# Altium PCB OPTO_PRESSURE.PcbDoc
Units mm, origin at the board's own origin, x right, y up, seen from the top; angles counter-clockwise.
Board outline 234 x 50 mm, 4 copper layers (Top Layer, Ground Plane, Power Plane, Bottom Layer), stack 0.844 mm thick; 43 components, 41 nets, 153 pads, 63 vias.
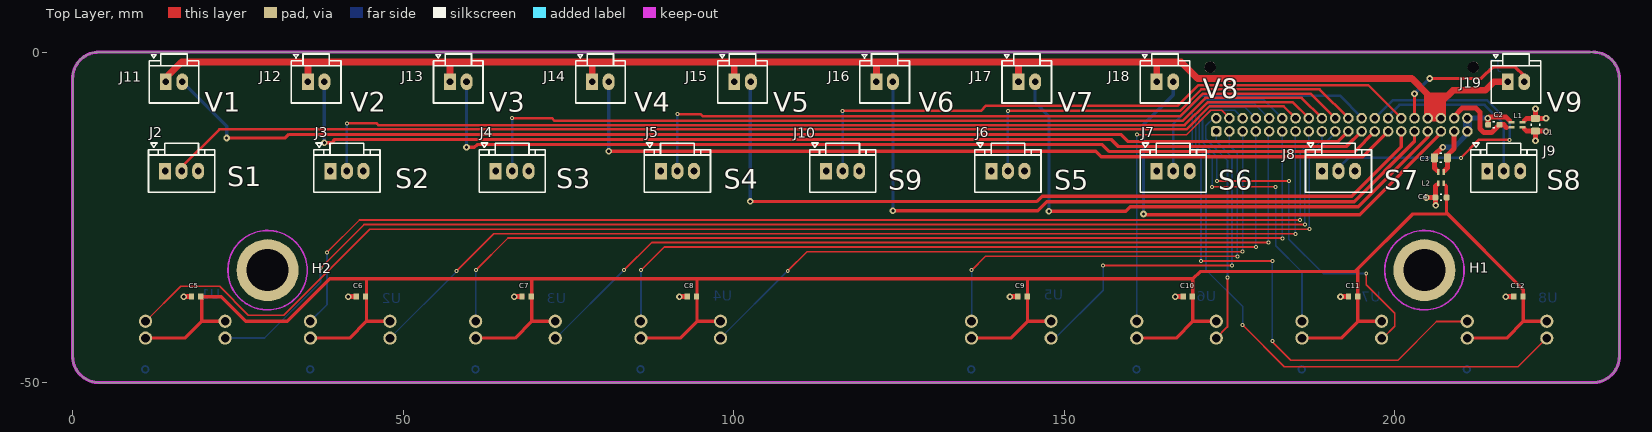
[diagram p0: Top Layer view]
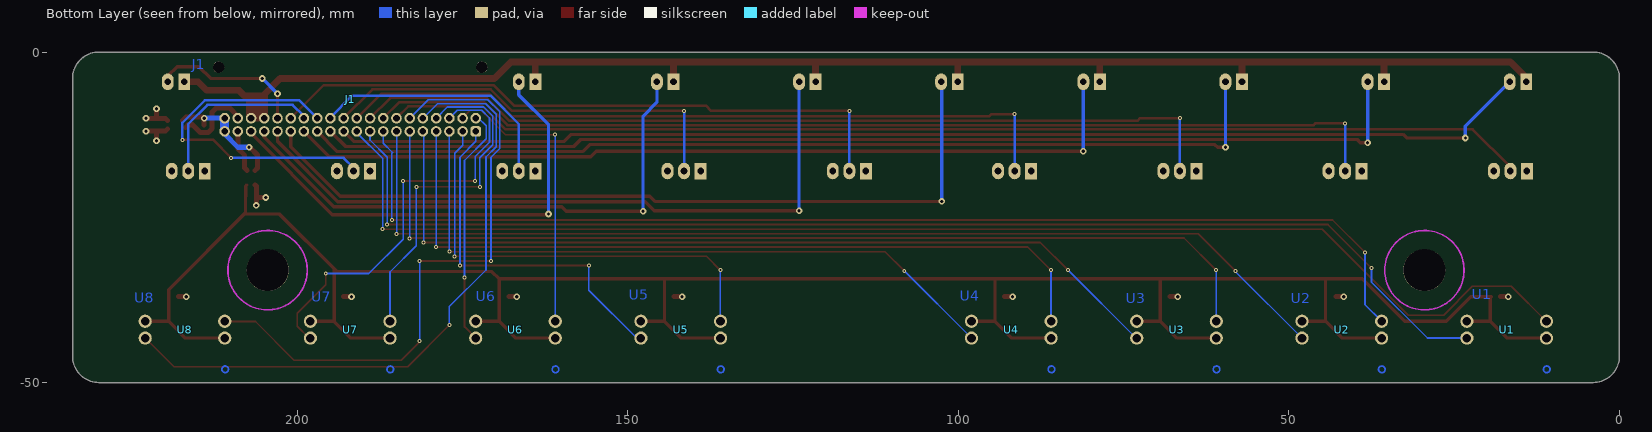
[diagram p1: Bottom Layer view, seen from below]
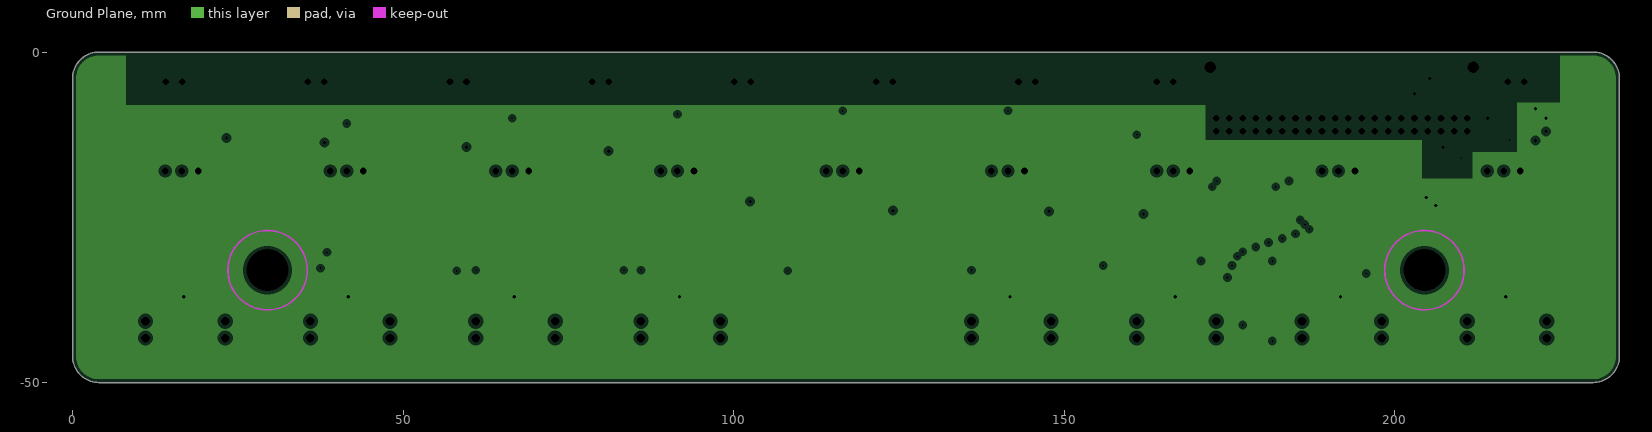
[diagram p2: Ground Plane, clearances drawn from the general rule]
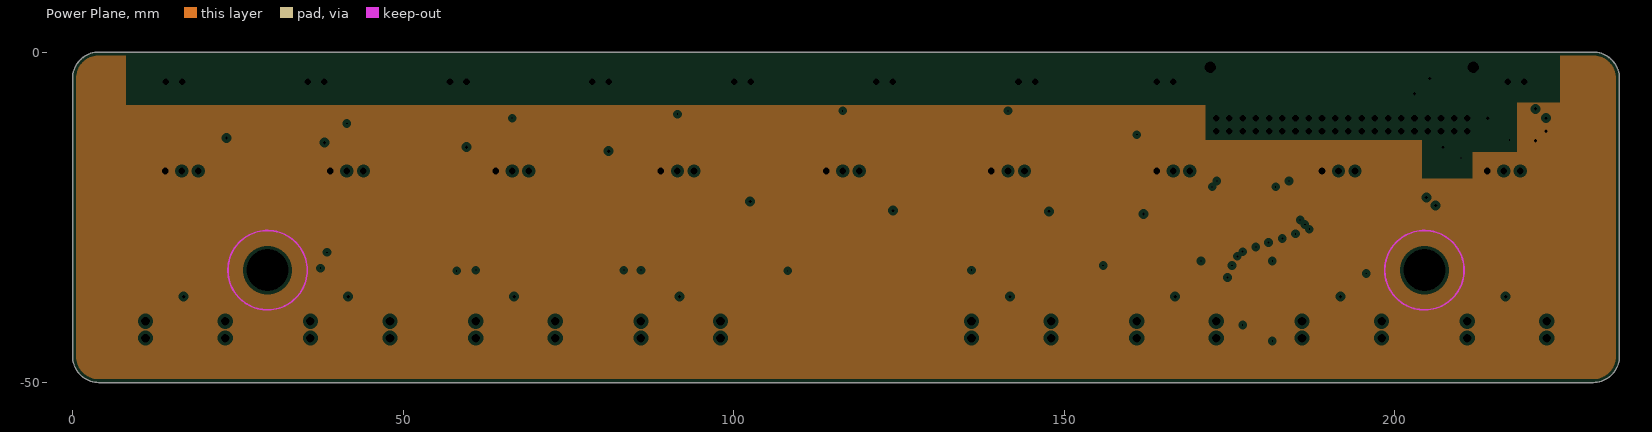
[diagram p3: Power Plane, clearances drawn from the general rule]
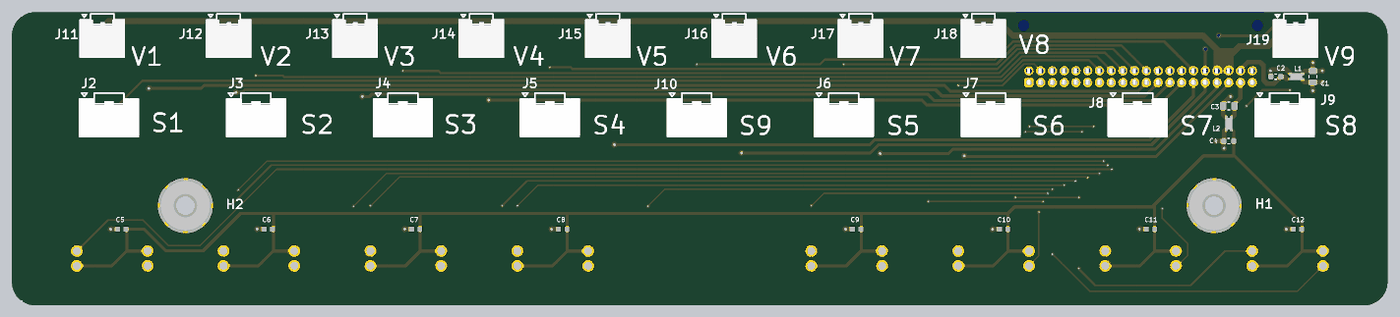
[diagram p4: 3D render of the assembled board from above, using the file's embedded part models]
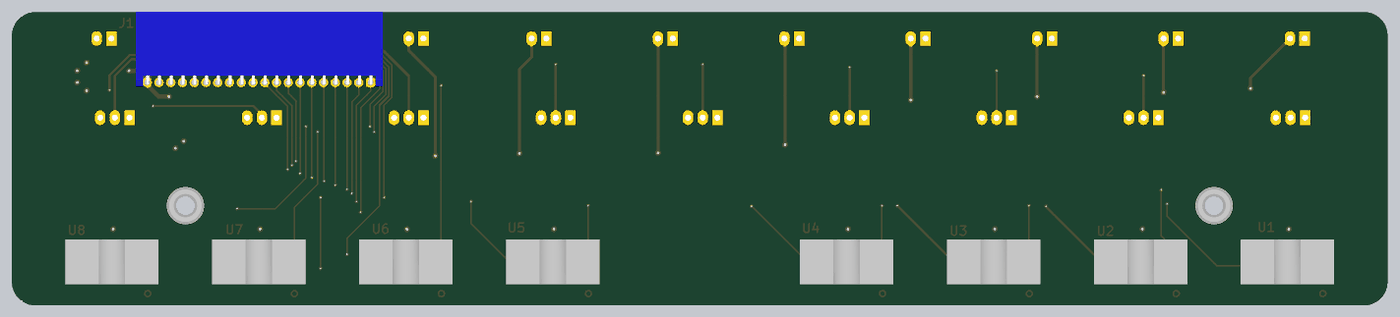
[diagram p5: 3D render of the assembled board from below, using the file's embedded part models]

## Layer stack, top to bottom
Top Solder: solder mask 0.0102, Solder Resist, Dk 3.5
Top Layer: signal copper 0.0356
Dielectric 1: core 0.32, FR-4, Dk 4.8
Ground Plane: plane copper 0.036, net AN_GND
Dielectric 3: prepreg 0.127, Dk 4.2
Power Plane: plane copper 0.036, net 5V_fil
Dielectric 4: core 0.254, Dk 4.2
Bottom Layer: signal copper 0.0356
Bottom Solder: solder mask 0.0102, Solder Resist, Dk 3.5

## Board outline
0.001,-46 0.001,-4 cw(c4.001,-4) 4.001,0 230.001,0 cw(c230.001,-4) 234.001,-4 234.001,-46 cw(c230.001,-46) 230.001,-50 4.001,-50 cw(c4.001,-46)

## Design rules (kind name [scope] priority, off if disabled: settings)
Clearance [All] p1: gap=0.254 ignorepadtopadclearanceinfootprint=TRUE
HoleSize [All] p1: absolutevalues=TRUE maxlimit=25.4 minlimit=0.025 maxpercent=80.000 minpercent=20.000
MinimumSolderMaskSliver [All] p1: minsoldermaskwidth=0.178
PlaneClearance [All] p1: clearance=0.508
PlaneConnect [All] p1: planeconnectstyle=Direct reliefexpansion=0.508 reliefentries=4 reliefconductorwidth=0.508 reliefairgap=0.254
PolygonConnect [All] p1: connectstyle=Relief reliefconductorwidth=0.508 reliefentries=4 polygonreliefangle="90 Angle" airgapwidth=0.254
RoutingVias [All] p1: holewidth=0.711 width=1.27 viastyle="Through Hole" minholewidth=0.254 minwidth=0.508 maxholewidth=0.508 maxwidth=1.27
SilkToSilkClearance [All] p1: silktosilkclearance=0
SilkToSolderMaskClearance [IsPad] p1: minsilkscreentomaskgap=0.178 clearancetoexposedcopper=TRUE
SolderMaskExpansion [All] p1: expansion=0.102 istentingtop=FALSE
Width [All] p1: maxlimit=1.016 minlimit=0.203 preferedwidth=0.203 minimp=50.000000 maximp=50.000000 favimp=50.000000
24 further rules are at their usual default settings.

## Components (designator, comment, footprint, x,y, rotation, side; value= is the part's Value field where it differs from the comment)
C1 "47u/10V" CAPC2012X13N(0805) 221.3,-11 r270 top locked
C2 "1uf" CAPC1608X09N(0603) 215,-11 r0 top locked
C3 "47u/10V" CAPC2012X13N(0805) 207,-16 r0 top locked
C4 "1u" CAPC1608X09N(0603) 207,-22 r0 top locked
C5 "Cap Semi" 1608[0603] 18.7,-37 r180 top locked value=0.1uF
C6 "Cap Semi" 1608[0603] 43.6,-37 r180 top locked value=0.1uF
C7 "Cap Semi" 1608[0603] 68.7,-37 r180 top locked value=0.1uF
C8 "Cap Semi" 1608[0603] 93.7,-37 r180 top locked value=0.1uF
C9 "Cap Semi" 1608[0603] 143.7,-37 r180 top locked value=0.1uF
C10 "Cap Semi" 1608[0603] 168.7,-37 r180 top locked value=0.1uF
C11 "Cap Semi" 1608[0603] 193.7,-37 r180 top locked value=0.1uF
C12 "Cap Semi" 1608[0603] 218.7,-37 r180 top locked value=0.1uF
H1 "SMTSO_M4_4" SMTSO_M4_4 204.5,-33 r180 top locked
H2 "SMTSO_M4_4" SMTSO_M4_4 29.5,-33 r180 top locked
J1 "S40-PUDSS-1" S40B-PUDSS-1 173,-12 r180 bottom locked
J2 "CON3" XA3 14,-18 r180 top locked
J3 "CON3" XA3 39,-18 r180 top locked
J4 "CON3" XA3 64,-18 r180 top locked
J5 "CON3" XA3 89,-18 r180 top locked
J6 "CON3" XA3 139,-18 r180 top locked
J7 "CON3" XA3 164,-18 r180 top locked
J8 "CON3" XA3 189,-18 r180 top locked
J9 "CON3" XA3 214,-18 r180 top locked
J10 "CON3" XA3 114,-18 r180 top locked
J11 "VALVE" XA2 14.1,-4.5 r180 top locked
J12 "VALVE" XA2 35.6,-4.5 r180 top locked
J13 "VALVE" XA2 57.1,-4.5 r180 top locked
J14 "VALVE" XA2 78.6,-4.5 r180 top locked
J15 "VALVE" XA2 100.1,-4.5 r180 top locked
J16 "VALVE" XA2 121.6,-4.5 r180 top locked
J17 "VALVE" XA2 143.1,-4.5 r180 top locked
J18 "VALVE" XA2 164,-4.5 r180 top
J19 "VALVE" XA2 217.1,-4.5 r180 top locked
L1 "744231091" WE-CNSW-0805 218.5,-11 r180 top locked
L2 "744231091" WE-CNSW-0805 207,-19 r270 top locked
U1 "OPB350L250" OPB350L250 17.055,-42 r0 bottom locked
U2 "OPB350L250" OPB350L250 42,-42 r0 bottom locked
U3 "OPB350L250" OPB350L250 67,-42 r0 bottom locked
U4 "OPB350L250" OPB350L250 92,-42 r0 bottom locked
U5 "OPB350L250" OPB350L250 142,-42 r0 bottom locked
U6 "OPB350L250" OPB350L250 167,-42 r0 bottom locked
U7 "OPB350L250" OPB350L250 192,-42 r0 bottom locked
U8 "OPB350L250" OPB350L250 217,-42 r0 bottom locked

## Footprints (in the part's own frame and the unit in brackets; to place one, negate y for a bottom-side part, rotate by r counter-clockwise, add the part's x,y. Pads: shape width x height; smd on the part's side, far side on the other; paste and mask are expansions set on the pad)
1608[0603] [mm] "Chip Capacitor, Body 1.6x0.8mm, IPC High Density"
  rect 0.8x0.9 smd: 1(-0.7,0) 2(0.7,0)
  body extent -0.87,-0.48 0.87,0.48, height 1.3
CAPC1608X09N(0603) [mm] "Chip Capacitor 0603, 2-Leads, Body 1.7x0.8mm, H0.9mm, IPC Medium Density"
  rrect50% 0.9x0.9 smd: 1(-0.85,0) 2(0.85,0)
  silkscreen extent -0.13,-0.44 0.13,0.46, body extent -0.85,-0.45 0.85,0.45, height 0.9
CAPC2012X13N(0805) [mm] "Chip Capacitor 0805, 2-Leads, Body 2.0x1.3mm, H1.3mm, IPC Medium Density"
  rrect30% 1.05x1.35 smd: 1(-0.975,0) 2(0.975,0)
  silkscreen extent -0.15,-0.67 0.15,0.68, body extent -1.05,-0.67 1.05,0.68, height 1.35
OPB350L250 [mm] "PCB mount for 1/4' tubing liquid sensor"
  round 2 hole 1.3: 1(-6.02,1.27) 2(-6.02,-1.27) 3(6.02,-1.27) 4(6.02,1.27)
  body extent -7.94,-3.21 7.94,4.41, height 13.34
S40B-PUDSS-1 [mm] "JST - PUD Connector 20x2 Right Angle"
  round 1.7 hole 1.7 unplated: 0(-38.9,9.7) 0(0.9,9.7)
  rrect50% 1.6x1.6 hole 1: 1(0,0)
  round 1.6 hole 1: 2(0,2) 3(-2,0) 4(-2,2) 5(-4,0) 6(-4,2) 7(-6,0) 8(-6,2) 9(-8,0) 10(-8,2) 11(-10,0) 12(-10,2) 13(-12,0) 14(-12,2) 15(-14,0) 16(-14,2) 17(-16,0) 18(-16,2) 19(-18,0) 20(-18,2) 21(-20,0) 22(-20,2) 23(-22,0) 24(-22,2) 25(-24,0) 26(-24,2) 27(-26,0) 28(-26,2) 29(-28,0) 30(-28,2) 31(-30,0) 32(-30,2) 33(-32,0) 34(-32,2) 35(-34,0) 36(-34,2) 37(-36,0) 38(-36,2) 39(-38,0) 40(-38,2)
  body extent -39.9,-0.63 2.1,12.07, height 8.5
SMTSO_M4_4 [mm] "SMT Standoff Thread M4, 4mm height"
  round 9.37 / inner round 6.35 / far side round 6.35 hole 6.35 unplated paste+0: 0(0,0)
  body extent -4.37,-4.37 4.37,4.37, height 4.03
WE-CNSW-0805 [mm] "SMD Inductor, 4-Leads, Body 1.4 x 2.2 mm"
  rect 0.9x0.4 smd: 1(-0.85,0.4) 2(0.85,0.4) 3(0.85,-0.4) 4(-0.85,-0.4)
  body extent -1,-0.6 1,0.6, height 1.18
XA2 [mm] "JST - XA 2 ways, 2.54mm pitch"
  rect 1.8x2.5 hole 1: 1(0,0)
  oval 1.8x2.5 hole 1: 2(-2.5,0)
  silkscreen extent -5,-4.2 2.5,3.2, body extent -5.05,-3.2 2.45,3.2, height 8.8
XA3 [mm] "JST - XA Connector 3 ways"
  rect 1.8x2.5 hole 1: 1(0,0)
  oval 1.8x2.5 hole 1: 2(-2.5,0) 3(-5,0)
  silkscreen extent -7.5,-4.23 2.5,3.2, body extent -7.49,-3.2 2.51,3.2, height 2.9

## Part data
C1 C3: library part C2012X5R1A476M125AC, "Capacitor, Ceramic, 10V, ±20%, X5R, -55°C to 85°C", 04 Value=47u, 06 Package=0805, 08 Manufacturer=TDK, 01 Part Category=Capacitor, 02 Part Number=C2012X5R1A476M125AC, 03 Description="Capacitor, Ceramic, 10V, ±20%, X5R, -55°C to 85°C", 05 Footprint Type=SMD, 09 Digikey PN=445-8239-2-ND, componentlink1description=Datasheet, componentlink1url=L:\Datasheet\Capacitor\mlcc_commercial_general_en.pdf
C2: library part GRM188R71E105KA12D, "Capacitor, Ceramic, 25V, ±10%, X7R, -55°C to 125°C", 04 Value=1u, 06 Package=0603, 08 Manufacturer="Murata Electronics North America", 01 Part Category=Capacitor, 02 Part Number=GRM188R71E105KA12D, 03 Description="Capacitor, Ceramic, 25V, ±10%, X7R, -55°C to 125°C", 05 Footprint Type=SMD, 09 Digikey PN=490-5307-2-ND, 12 Author=D.Grace, componentlink1description=Datasheet, componentlink1url=L:\Datasheet\Capacitor\c02e.pdf
C4: library part GRM188R71E105KA12D, "Capacitor, Ceramic, 25V, ±10%, X7R, -55°C to 125°C", 06 Package=0603, 08 Manufacturer="Murata Electronics North America", 01 Part Category=Capacitor, 02 Part Number=GRM188R71E105KA12D, 03 Description="Capacitor, Ceramic, 25V, ±10%, X7R, -55°C to 125°C", 04 Value=1u, 05 Footprint Type=SMD, 09 Digikey PN=490-5307-2-ND, 12 Author=D.Grace, componentlink1description=Datasheet, componentlink1url=L:\Datasheet\Capacitor\c02e.pdf
C5 C6 C7 C8 C9 C10 C11 C12: "Capacitor (Semiconductor SIM Model)", LatestRevisionDate=29-May-2009, LatestRevisionNote="IPC-7351 Footprint Added.", PackageDescription="Chip Capacitor", Published=8-Jun-2000, Publisher="Altium Limited"
  C5 C7 C8 C9 C10 C11 C12: PackageReference=C1206
  C6: PackageReference=C0805
H1 H2: library part "SMD standoff", "SMD Standoff M4_4mm"
J1: library part "Header 20X2", "Header, 20-Pin, Dual row", LatestRevisionDate=17-Jul-2002, LatestRevisionNote="Re-released for DXP Platform.", Publisher="Altium Limited"
J2 J3 J4 J5 J6 J7 J8 J9 J10: "CON", MFR 1=JST, MFR 1 PN=B03B-XASK-1(LF)(SN), Part="Boxed Pin Header 3x1 2.5mm", Supplier 1=DigiKey, Supplier 1 PN=455-1990-ND
J11 J12 J13 J14 J15 J16 J17 J18 J19: library part "Header 2", "Header, 2-Pin", LatestRevisionDate=17-Jul-2002, LatestRevisionNote="Re-released for DXP Platform.", Publisher="Altium Limited"
L1 L2: library part CMP-0222-00046-1, "SMD Common Mode Noise Suppressor WE-CNSW, Z = 90 Ohm", componentlink1description="Manufacturer Link", componentlink1url=http://www.we-online.com, componentlink2description=Datasheet, componentlink2url=http://www.we-online.de/katalog/media/pdf/744231091.pdf, DatasheetVersion="ver 4, Nov-2010", Impedance="90 Ohm", PackageDescription="SMD Inductor, 4-Leads, Body 1.4 x 2.2 mm", PackageReference=WE-CNSW-0805, PackageVersion=2010
U1 U2 U3 U4 U5 U6 U7 U8: library part Optoisolator1, "4-Pin Phototransistor Optocoupler", DatasheetVersion=Nov-2003, LatestRevisionDate=04-Mar-2005, LatestRevisionNote="Sch pins 3 & 4 Swapped.", PackageReference=DIP-4, Published=24-Mar-1999, Publisher="Altium Limited"

## Via types
v1: diameter 0.6, hole 0.3, Top Layer to Bottom Layer, tented both sides, 37 vias
v2: diameter 1, hole 0.5, Top Layer to Bottom Layer, tented both sides, 26 vias

## Nets (pads, with @x,y where several pads share a name; then routed paths per layer and width w, separated by ;. In a path a pad name is that pad's centre, name@x,y a point inside that pad or via, vN(x,y) a via of type N, cw(c..) or ccw(c..) an arc to the next point about the centre after c; other vN are vias at no path point)
0V: C2.1 C3.1 J1.39 J1.40 L1.3 L2.4 | length 16.6
  Top Layer w0.762: 206.38,-17.894 206.025,-17.539 C3.1 206.025,-15.575 207.2,-14.4 v2(207.3,-14.4) ; C2.1 v2@214.15,-10 ; v2@214.3,-9.8 216.814,-9.8 217.394,-10.38
  Bottom Layer w0.762: v2(207.3,-14.4) 209,-14.4 211,-12.4 J1.39 ; J1.40 v2(214.1,-10)
3.3VAN: C3.2 J1.37 L2.1 | length 6.5
  Top Layer w0.762: 207.62,-17.894 207.975,-17.539 C3.2 207.975,-15.625 209,-14.6 J1.37
3v3_fil: C4.2 C5.1 C6.1 C7.1 C8.1 C9.1 C10.1 C11.1 C12.1 L2.2 U1.1 U1.3 U2.1 U2.3 U3.1 U3.3 U4.1 U4.3 U5.1 U5.3 U6.1 U6.3 U7.1 U7.3 U8.1 U8.3 | length 371.2
  Top Layer w0.508: U1.1@11.005,-43.262 16.993,-43.262 19.517,-40.738 C5.1@19.517,-37 ; C5.1 C5.1@19.517,-37 ; 19.525,-40.73 U1.3 ; U2.1@35.95,-43.262 41.938,-43.262 44.462,-40.738 44.462,-34.3 ; 44.47,-40.73 U2.3 ; U3.1@60.95,-43.262 66.938,-43.262 69.463,-40.738 69.463,-34.3 ; 69.47,-40.73 U3.3 ; U4.1@85.95,-43.262 91.937,-43.262 94.462,-40.738 94.462,-34.3 ; 94.47,-40.73 U4.3 ; U5.1@135.95,-43.262 141.938,-43.262 144.463,-40.738 144.463,-34.3 ; 144.47,-40.73 U5.3 ; U6.1@160.95,-43.262 166.937,-43.262 169.462,-40.738 169.462,-34.3 ; 169.47,-40.73 U6.3 ; U7.1@185.95,-43.262 191.938,-43.262 194.4,-40.8 C11.1 194.4,-33.2 ; 194.47,-40.73 U7.3 ; 207.62,-20.106 207.823,-20.309 C4.2@207.823,-21.848 ; C4.2 207.85,-24.35 219.462,-35.962 219.462,-40.738 ; 207.9,-24.5 202.7,-24.5 194.4,-32.8 ; U8.1@210.95,-43.262 216.938,-43.262 219.462,-40.738 ; U8.3 219.47,-40.73 219.462,-40.738 ; C5.1@19.517,-37 22.5,-37 26.2,-40.7 32.5,-40.7 38.9,-34.3 44.462,-34.3 ; 44.462,-34.3 69.463,-34.3 ; 69.463,-34.3 94.462,-34.3 ; 94.462,-34.3 144.463,-34.3 ; 144.463,-34.3 169.462,-34.3 ; 169.462,-34.3 170.562,-33.2 194,-33.2 ; 194,-33.2 194.4,-32.8 ; 194,-33.2 194.4,-33.2 ; 194.4,-33.2 194.4,-32.8
5V: C2.2 J1.38 L1.2 | length 12.4
  Top Layer w0.762: J1.38 209,-9.7 210.2,-8.5 212.3,-8.5 212.9,-9.1 212.9,-11.6 213.5,-12.2 214.65,-12.2 C2.2 216.5,-11 216.9,-11.4
5V_fil: C1.2 J2.1 J3.1 J4.1 J5.1 J6.1 J7.1 J8.1 J9.1 J10.1 L1.1 | length 4.9
  Top Layer w0.762: 219.606,-11.62 219.961,-11.975 C1.2 ; v2(221.3,-13.4) v2@221.3,-13 ; v2@221.3,-13 C1.2 ; v2(222.9,-12) 222.875,-11.975 C1.2
AN_GND: C1.1 C4.1 C5.2 C6.2 C7.2 C8.2 C9.2 C10.2 C11.2 C12.2 J2.3 J3.3 J4.3 J5.3 J6.3 J7.3 J8.3 J9.3 J10.3 L1.4 L2.3 | length 18.9
  Top Layer w0.762: v2(16.8,-37) C5.2 ; v2(41.7,-37) C6.2 ; v2(66.8,-37) C7.2 ; v2(91.8,-37) C8.2 ; v2(141.8,-37) C9.2 ; v2(166.8,-37) C10.2 ; v2(191.8,-37) C11.2 ; v2@204.7,-22 C4.1 206.15,-23.15 v2(206.2,-23.2) ; C4.1@206.197,-21.828 206.197,-20.289 206.38,-20.106 ; v2(216.8,-37) C12.2 ; 219.606,-10.38 219.961,-10.025 C1.1 ; v2(221.3,-8.6) C1.1 ; v2(222.9,-10) 222.875,-10.025 C1.1
  other v2: 204.8,-22
PR_SENSE1: J1.14 J2.2 | length 173.7
  Top Layer w0.381: J2.2 16.5,-17.4 22.2,-11.7 168.5,-11.7 172,-8.2 183.2,-8.2 J1.14
PR_SENSE2: J1.16 J3.2 | length 155.3
  Top Layer w0.381: v1(41.5,-10.8) 46,-10.8 46.265,-11.065 168.235,-11.065 171.735,-7.565 184.565,-7.565 J1.16
  Bottom Layer w0.381: J3.2 v1(41.5,-10.8)
PR_SENSE3: J1.18 J4.2 | length 133.4
  Top Layer w0.381: v1(66.5,-10) 72.5,-10 72.9,-10.4 167.9,-10.4 171.37,-6.93 185.93,-6.93 J1.18
  Bottom Layer w0.381: J4.2 v1(66.5,-10)
PR_SENSE4: J1.20 J5.2 | length 111.2
  Top Layer w0.381: v1(91.5,-9.4) 95,-9.4 95.3,-9.7 167.6,-9.7 171.005,-6.295 187.295,-6.295 J1.20
  Bottom Layer w0.381: J5.2 v1(91.5,-9.4)
PR_SENSE5: J1.22 J6.2 | length 63.7
  Top Layer w0.381: v1(141.5,-8.9) 167.5,-8.9 170.741,-5.659 188.659,-5.659 J1.22
  Bottom Layer w0.381: J6.2 v1(141.5,-8.9)
PR_SENSE6: J1.24 J7.2 | length 38.8
  Bottom Layer w0.381: J7.2 166.5,-10.9 170.8,-6.6 191.7,-6.6 195,-9.9 J1.24
PR_SENSE7: J1.26 J8.2 | length 53.7
  Top Layer w0.381: v1(210,-16) 212.7,-13.3 v1(217.4,-13.3)
  Bottom Layer w0.381: J8.2 191.5,-17.5 193,-16 v1(210,-16) ; J1.26 199.7,-7.3 214,-7.3 217.4,-10.7 v1(217.4,-13.3)
PR_SENSE8: J1.28 J9.2 | length 26.8
  Bottom Layer w0.381: J1.28 199,-9.7 200.7,-8 213.6,-8 216.5,-10.9 J9.2
PR_SENSE9: J1.30 J10.2 | length 97.3
  Top Layer w0.381: v1(116.5,-8.9) 137.4,-8.9 138.2,-8.1 167.2,-8.1 170.3,-5 196,-5 J1.30
  Bottom Layer w0.381: J10.2 v1(116.5,-8.9)
PWM1_AN: J1.19 U1.2 | length 201.9
  Top Layer w0.254: U1.2@11.03,-40.762 16.346,-35.446 22.246,-35.446 26.6,-39.8 31.932,-39.8 44.932,-26.8 v1(187.1,-26.8)
  Bottom Layer w0.254: v1(187.1,-26.8) 187.1,-16.1 191,-12.2 J1.19
PWM2_AN: J1.15 U2.2 | length 174.7
  Top Layer w0.254: v1(38.5,-30.3) 43.4,-25.4 v1(185.7,-25.4)
  Bottom Layer w0.254: U2.2 38.5,-38.21 v1(38.5,-30.3) ; v1(185.7,-25.4) 185.7,-15.3 185.6,-15.2 187,-13.8 J1.15
PWM3_AN: J1.11 U3.2 | length 148
  Top Layer w0.254: v1(61,-33) 65.881,-28.119 182.919,-28.119 v1(183,-28.2)
  Bottom Layer w0.254: U3.2 61,-40.71 v1(61,-33) ; v1(183,-28.2) 183,-27.5 J1.11
PWM4_AN: J1.7 U4.2 | length 119.7
  Top Layer w0.254: v1(86,-33) 89.5,-29.5 v1(179,-29.5)
  Bottom Layer w0.254: U4.2 86,-40.71 v1(86,-33) ; v1(179,-29.5) J1.7
PWM5_AN: J1.3 U5.2 | length 68.2
  Top Layer w0.254: v1(136,-33) 138.1,-30.9 138.3,-30.9 v1(176.2,-30.9)
  Bottom Layer w0.254: U5.2 136,-40.71 v1(136,-33) ; J1.3 175,-14.1 176.2,-15.3 ; v1(176.2,-30.9) 176.2,-15.3
PWM6_AN: J1.4 U6.2 | length 44.7
  Top Layer w0.254: v1(161,-12.5) 168.508,-12.5 172.189,-8.819 173.819,-8.819 J1.4
  Bottom Layer w0.254: U6.2@161,-40.8 v1(161,-12.5) ; J1.4 J1.4@175,-9.6
PWM7_AN: J1.8 U7.2 | length 53
  Top Layer w0.254: v1(172.4,-20.4) v1(182,-20.4)
  Bottom Layer w0.254: v1(172.4,-20.4) 172.4,-16 170.416,-14.016 170.416,-9.684 171.789,-8.311 177.311,-8.311 J1.8 ; v1(182,-20.4) 182,-29.3 185.975,-33.275 U7.2@185.975,-40.762
PWM8_AN: J1.12 U8.2 | length 94.8
  Top Layer w0.254: v1(170.7,-31.6) 181.4,-31.6 181.5,-31.5 v1(181.5,-31.6) ; v1(181.5,-43.7) 181.5,-43.8 184.3,-46.6 200.5,-46.6 206.337,-40.762 U8.2@210.975,-40.762
  Bottom Layer w0.254: v1(170.7,-31.6) 170.7,-15.9 169.4,-14.6 169.4,-9 171.2,-7.2 180.2,-7.2 J1.12 ; v1(181.5,-43.7) v1(181.5,-31.6)
SENSOR1: J1.17 U1.4 | length 186.8
  Top Layer w0.254: v1(37.5,-32.7) 44.1,-26.1 v1(186.4,-26.1)
  Bottom Layer w0.254: U1.4 29.03,-43.27 37.5,-34.8 v1(37.5,-32.7) ; v1(186.4,-26.1) 186.4,-15.9 189,-13.3 J1.17
SENSOR2: J1.13 U2.4 | length 159.1
  Top Layer w0.254: v1(58.1,-33.1) 63.7,-27.5 v1(185,-27.5)
  Bottom Layer w0.254: U2.4 58.1,-33.19 v1(58.1,-33.1) ; v1(185,-27.5) 184.97,-27.47 184.97,-12.03 J1.13
SENSOR3: J1.9 U3.4 | length 130.7
  Top Layer w0.254: v1(83.4,-33) 87.6,-28.8 v1(180.9,-28.8)
  Bottom Layer w0.254: U3.4 73.13,-43.27 v1(83.4,-33) ; v1(180.9,-28.8) 180.9,-12.1 J1.9
SENSOR4: J1.5 U4.4 | length 102.6
  Top Layer w0.254: v1(108.19,-33.1) 111.09,-30.2 v1(177,-30.2)
  Bottom Layer w0.254: U4.4 v1(108.19,-33.1) ; v1(177,-30.2) 177,-29.7 J1.5
SENSOR5: J1.1 U5.4 | length 55.2
  Top Layer w0.254: v1(155.9,-32.3) v1(175.4,-32.3)
  Bottom Layer w0.254: U5.4@148,-43.262 148.659,-43.262 155.9,-36.022 v1@155.9,-32.5 ; J1.1 173,-13.5 175.4,-15.9 v1(175.4,-32.3)
SENSOR6: J1.2 U6.4 | length 36.2
  Top Layer w0.254: U6.4@173,-43.262 174.681,-41.581 174.7,-41.581 v1(174.7,-34.1)
  Bottom Layer w0.254: J1.2 172.6,-10 171.432,-11.168 171.432,-13.132 174.7,-16.4 v1(174.7,-34.1)
SENSOR7: J1.6 U7.4 | length 63.5
  Top Layer w0.254: v1(173.1,-19.5) v1(184,-19.5) ; v1(195.7,-33.5) 195.7,-35.2 200,-39.5 200,-41.5 198.237,-43.262 U7.4@198,-43.262
  Bottom Layer w0.254: v1(173.1,-19.5) 173.1,-15.8 170.924,-13.624 170.924,-9.976 172.081,-8.819 175.819,-8.819 J1.6 ; v1(184,-19.5) 184,-28.3 189.2,-33.5 v1(195.7,-33.5)
SENSOR8: J1.10 U8.4 | length 97.9
  Top Layer w0.254: v1(177,-41.3) 183.3,-47.6 218.662,-47.6 U8.4@223,-43.262
  Bottom Layer w0.254: v1(177,-41.3) 177,-38.5 171.47,-32.97 171.47,-15.87 169.908,-14.308 169.908,-9.392 171.497,-7.803 178.803,-7.803 J1.10
Valve1: J1.21 J11.2 | length 182.3
  Top Layer w0.508: v2(23.3,-13) 32.2,-13 32.732,-12.468 158.568,-12.468 159.627,-13.527 191.473,-13.527 J1.21
  Bottom Layer w0.508: J11.2 23.3,-11.2 v2(23.3,-13)
Valve2: J1.23 J12.2 | length 167.7
  Top Layer w0.508: v2(38.1,-13.7) 39.2,-13.7 39.67,-13.23 157.13,-13.23 158.189,-14.289 192.711,-14.289 J1.23
  Bottom Layer w0.508: v2(38.1,-13.7) J12.2@38.1,-4.5
Valve3: J1.25 J13.2 | length 149.2
  Top Layer w0.508: v2(59.6,-14.4) 60.8,-14.4 61.208,-13.992 155.792,-13.992 156.851,-15.051 193.949,-15.051 J1.25
  Bottom Layer w0.508: v2(59.6,-14.4) J13.2
Valve4: J1.27 J14.2 | length 130.3
  Top Layer w0.508: v2(81.1,-15) 154.8,-15 155.1,-15.3 155.4,-15.6 155.634,-15.834 195.166,-15.834 J1.27
  Bottom Layer w0.508: v2(81.1,-15) J14.2
Valve5: J1.29 J15.2 | length 122.4
  Top Layer w0.508: v2(102.5,-22.6) 145.9,-22.6 146.7,-21.8 193.5,-21.8 201,-14.3 J1.29
  Bottom Layer w0.508: v2(102.5,-22.6) 102.5,-4.6 J15.2
Valve6: J1.31 J16.2 | length 104.2
  Top Layer w0.508: v2(124.1,-24) 146,-24 147.362,-22.638 193.862,-22.638 203,-13.5 J1.31
  Bottom Layer w0.508: v2(124.1,-24) J16.2@124.1,-4.501
Valve7: J1.33 J17.2 | length 83.5
  Top Layer w0.508: v2(147.7,-24.1) 159.3,-24.1 160,-23.4 194.5,-23.4 205,-12.9 J1.33
  Bottom Layer w0.508: J17.2@145.6,-4.707 J17.2 145.6,-7.6 147.7,-9.7 v2(147.7,-24.1)
Valve8: J1.35 J18.2 | length 72.3
  Top Layer w0.508: v2(162,-24.5) 162.1,-24.6 185.357,-24.6 185.365,-24.592 186.035,-24.592 186.043,-24.6 194.7,-24.6 207,-12.3 J1.35
  Bottom Layer w0.508: v2(162,-24.5) 162,-11.001 ; 162,-11 166.5,-6.5 J18.2
Valve9: J1.32 J19.2 | length 23.5
  Top Layer w0.508: J1.32 v2(203,-6.3) ; v2(205.3,-4) 213.1,-4 214.9,-2.2 218.2,-2.2 219.6,-3.6 J19.2
  Bottom Layer w0.508: v2(203,-6.3) v2(205.3,-4)
WDOG-24V: J1.34 J1.36 J11.1 J12.1 J13.1 J14.1 J15.1 J16.1 J17.1 J18.1 J19.1 | length 234.9
  Top Layer w1.016: J11.1@14,-5 14,-4 16.5,-1.5 167.7,-1.5 170.2,-4 202.6,-4 205,-6.4 J1.34 J1.36 207,-7.6 208.8,-5.8 213.7,-5.8 215,-4.5 216.5,-4.5 J19.1@217,-5 ; J12.1 35.6,-1.6 ; J13.1 57.1,-1.6 ; J14.1 78.6,-1.6 ; J15.1 100.1,-1.6 ; J16.1 121.6,-1.6 ; J17.1 143.1,-1.6 ; J18.1 164,-1.6
pads on no net: H1.0 H2.0 J1.0
copper on no net: | length 25.1
  Bottom Layer w0.254: 11.5,-48 ccw(c11,-48) 11.5,-48 ; 36.445,-48 ccw(c35.945,-48) 36.445,-48 ; 61.445,-48 ccw(c60.945,-48) 61.445,-48 ; 86.415,-47.992 ccw(c85.915,-47.992) 86.415,-47.992 ; 136.445,-48 ccw(c135.945,-48) 136.445,-48 ; 161.445,-48 ccw(c160.945,-48) 161.445,-48 ; 186.445,-48 ccw(c185.945,-48) 186.445,-48 ; 211.415,-47.992 ccw(c210.915,-47.992) 211.415,-47.992

## Polygon pours and split planes (outlines as drawn)
AN_GND on Ground Plane (split plane): 230.25,-0.517 230.498,-0.544 230.743,-0.588 230.985,-0.65 231.221,-0.728 231.452,-0.824 231.675,-0.935 231.889,-1.063 232.094,-1.205 232.288,-1.361 232.47,-1.531 232.64,-1.713 232.796,-1.908 232.939,-2.112 233.066,-2.327 233.177,-2.55 233.273,-2.78 233.352,-3.016 233.413,-3.258 233.457,-3.503 233.484,-3.751 233.492,-3.984 233.491,-4 233.491,-46 233.492,-46.016 233.484,-46.249 233.457,-46.497 233.413,-46.742 233.352,-46.984 233.273,-47.22 233.177,-47.45 233.066,-47.673 232.939,-47.888 232.796,-48.092 232.64,-48.287 232.47,-48.469 232.288,-48.639 232.094,-48.795 231.889,-48.937 231.675,-49.065 231.452,-49.176 231.221,-49.272 230.985,-49.35 230.743,-49.412 230.498,-49.456 230.25,-49.483 230.017,-49.491 230.001,-49.49 4.001,-49.49 3.985,-49.491 3.752,-49.483 3.504,-49.456 3.259,-49.412 3.018,-49.35 2.781,-49.272 2.551,-49.176 2.328,-49.065 2.114,-48.937 1.909,-48.795 1.715,-48.639 1.532,-48.469 1.362,-48.287 1.206,-48.092 1.064,-47.888 0.937,-47.673 0.825,-47.45 0.73,-47.22 0.651,-46.984 0.589,-46.742 0.545,-46.497 0.518,-46.249 0.51,-46.016 0.512,-46 0.512,-4 0.51,-3.984 0.518,-3.751 0.545,-3.503 0.589,-3.258 0.651,-3.016 0.73,-2.78 0.825,-2.55 0.937,-2.327 1.064,-2.112 1.206,-1.908 1.362,-1.713 1.532,-1.531 1.715,-1.361 1.909,-1.205 2.114,-1.063 2.328,-0.935 2.551,-0.824 2.781,-0.728 3.018,-0.65 3.259,-0.588 3.504,-0.544 3.752,-0.517 3.985,-0.509 4.001,-0.51 8.1,-0.51 8.1,-8 171.4,-8 171.4,-13.3 204.2,-13.3 204.2,-19.1 211.7,-19.1 211.7,-15.065 218.5,-15.065 218.5,-7.6 225,-7.6 225,-0.51 230.001,-0.51 230.017,-0.509
5V_fil on Power Plane (split plane): 230.25,-0.517 230.498,-0.544 230.743,-0.588 230.985,-0.65 231.221,-0.728 231.452,-0.824 231.675,-0.935 231.889,-1.063 232.094,-1.205 232.288,-1.361 232.47,-1.531 232.64,-1.713 232.796,-1.908 232.939,-2.112 233.066,-2.327 233.177,-2.55 233.273,-2.78 233.352,-3.016 233.413,-3.258 233.457,-3.503 233.484,-3.751 233.492,-3.984 233.491,-4 233.491,-46 233.492,-46.016 233.484,-46.249 233.457,-46.497 233.413,-46.742 233.352,-46.984 233.273,-47.22 233.177,-47.45 233.066,-47.673 232.939,-47.888 232.796,-48.092 232.64,-48.287 232.47,-48.469 232.288,-48.639 232.094,-48.795 231.889,-48.937 231.675,-49.065 231.452,-49.176 231.221,-49.272 230.985,-49.35 230.743,-49.412 230.498,-49.456 230.25,-49.483 230.017,-49.491 230.001,-49.49 4.001,-49.49 3.985,-49.491 3.752,-49.483 3.504,-49.456 3.259,-49.412 3.018,-49.35 2.781,-49.272 2.551,-49.176 2.328,-49.065 2.114,-48.937 1.909,-48.795 1.715,-48.639 1.532,-48.469 1.362,-48.287 1.206,-48.092 1.064,-47.888 0.937,-47.673 0.825,-47.45 0.73,-47.22 0.651,-46.984 0.589,-46.742 0.545,-46.497 0.518,-46.249 0.51,-46.016 0.512,-46 0.512,-4 0.51,-3.984 0.518,-3.751 0.545,-3.503 0.589,-3.258 0.651,-3.016 0.73,-2.78 0.825,-2.55 0.937,-2.327 1.064,-2.112 1.206,-1.908 1.362,-1.713 1.532,-1.531 1.715,-1.361 1.909,-1.205 2.114,-1.063 2.328,-0.935 2.551,-0.824 2.781,-0.728 3.018,-0.65 3.259,-0.588 3.504,-0.544 3.752,-0.517 3.985,-0.509 4.001,-0.51 8.1,-0.51 8.1,-8 171.4,-8 171.4,-13.3 204.2,-13.3 204.2,-19.1 211.7,-19.1 211.7,-15.065 218.5,-15.065 218.5,-7.6 225,-7.6 225,-0.51 230.001,-0.51 230.017,-0.509

## Keep-outs
Top Layer:
  lines w0.5: 229.5,0 4,0 ccw(c4,-4) 0,-4 0,-46 ccw(c4,-46) 4,-50 230,-50 ccw(c230,-46) 234,-46 234,-4 ccw(c230,-4) 230,0
Keep-Out Layer:
  circle w0.254: c204.5,-33 r6
  circle w0.254: c29.5,-33 r6

## Other copper
Top Layer:
  rectangle net WDOG-24V: 204.4,-10 207.8,-6.1
  text "TOP LAYER" at 150.9,-107.2 h1.52
Bottom Layer:
  rectangle net 0V: 210.3,-12 211.7,-10
  text ".Layer_Name" at 144.994,-113.89 h2.54
  text "BOTTOM LAYER" at 151.1,-115.2 h1.52
Ground Plane (plane layer: these items are gaps in the copper):
  pour cut-out: 8.1,0.004 8.1,-8 171.4,-8 171.4,-13.3 204.2,-13.3 204.2,-19.1 211.7,-19.1 211.7,-15.065 218.5,-15.065 218.5,-7.6 225,-7.6 225,0.224
  text "GROUND PLANE is Negative on gerber file and printed file" at 151,-109.8 h1.52
Power Plane (plane layer: these items are gaps in the copper):
  pour cut-out: 8.1,-0.213 8.1,-8 171.4,-8 171.4,-13.3 204.2,-13.3 204.2,-19.1 211.7,-19.1 211.7,-15.065 218.5,-15.065 218.5,-7.6 225,-7.6 225,0.006
  text "POWER PLANE  is negative on gerber file and printed file" at 151.1,-112.4 h1.52

## Silkscreen, mask and mechanical layers (free items; w line width, h text height)
Top Overlay:
  text "V8" at 171,-7 h3
  text "V1" at 20,-9 h3
  text "V2" at 42,-9 h3
  text "V3" at 63,-9 h3
  text "V4" at 85,-9 h3
  text "V5" at 106,-9 h3
  text "V6" at 128,-9 h3
  text "V7" at 149,-9 h3
  text "V9" at 223,-9 h3
  text "S1" at 23.4,-20.3 h3
  text "S2" at 48.8,-20.6 h3
  text "S3" at 73.2,-20.6 h3
  text "S4" at 98.5,-20.7 h3
  text "S9" at 123.4,-20.8 h3
  text "S5" at 148.5,-20.8 h3
  text "S6" at 173.3,-20.8 h3
  text "S7" at 198.4,-20.8 h3
  text "S8" at 223,-20.8 h3
  text "TOP OVERLAY" at 150.7,-104.3 h1.52
Top Paste:
  text ".Layer_Name" at 182.894,-106.49 h2.54
Top Solder:
  text ".Layer_Name" at 129.894,-114.09 h2.54
Bottom Solder:
  text ".Layer_Name" at 144.994,-113.89 h2.54
Drill Guide:
  text ".Layer_Name" at 130.994,-113.89 h2.54
PCB Layout:
  the board outline again, w0.1
Template:
  lines w0.254: 6.991,-93.317 61.499,-93.317 ; 7.067,-97.153 36.404,-97.153 ; 7.118,-101.242 61.499,-101.242 ; 36.43,-97.178 61.499,-97.178 ; 36.506,-101.267 36.506,-93.393 ; 6.991,-110.996 6.991,-88.085 61.499,-88.085 61.499,-110.996 6.991,-110.996
  text "Finished board thickness 1.6MM +/-10% (including solder mask and top silkscreen)" at 6.553,-68.194 h1.52
  text "1 OZ COPPER, UL94 V-0 compliant 1.6mm FR4" at 6.871,-71.669 h1.52
  text "Board to be routed" at 6.478,-74.644 h1.52
  text "Finish: ENIG" at 6.653,-78.344 h1.52
  text "Board must have PCB manufacturers UL mark" at 6.559,-81.306 h1.52
  text "NOTE: Ground plane and power plane layers are inverted" at 6.533,-84.735 h1.52
  text "TITLE:" at 9.022,-92.128 h2.44
  text "PRESSURE SENSOR BOARD" at 17.505,-92.128 h2.44
  text "CN:" at 38.335,-95.984 h2.44
  text "PCB No:  E05003" at 8.895,-96.039 h2.44
  text "16-AUG-19" at 44.837,-99.667 h2.44
  text "Date:" at 38.208,-99.769 h2.44
  text "PCB Rev No:   0.4" at 8.871,-100.048 h2.44
Drill Drawing:
  text ".Legend" at 131.4,-103.5 h3
  text ".Layer_Name" at 130.994,-113.89 h2.54

## Dimensions
4.001,-50 to 4.001,0 on Dimension
0.001,-46 to 234.001,-46 on Dimension